# EAGLE board gatilhov1 (EAGLE 7.5.0)
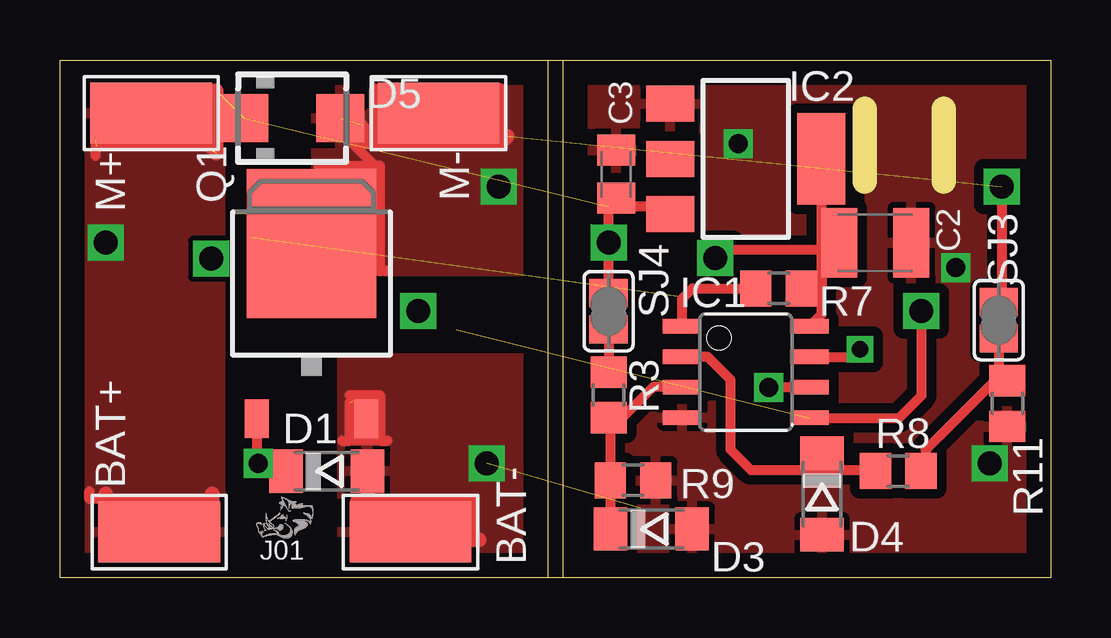
[diagram p0: board, top side]
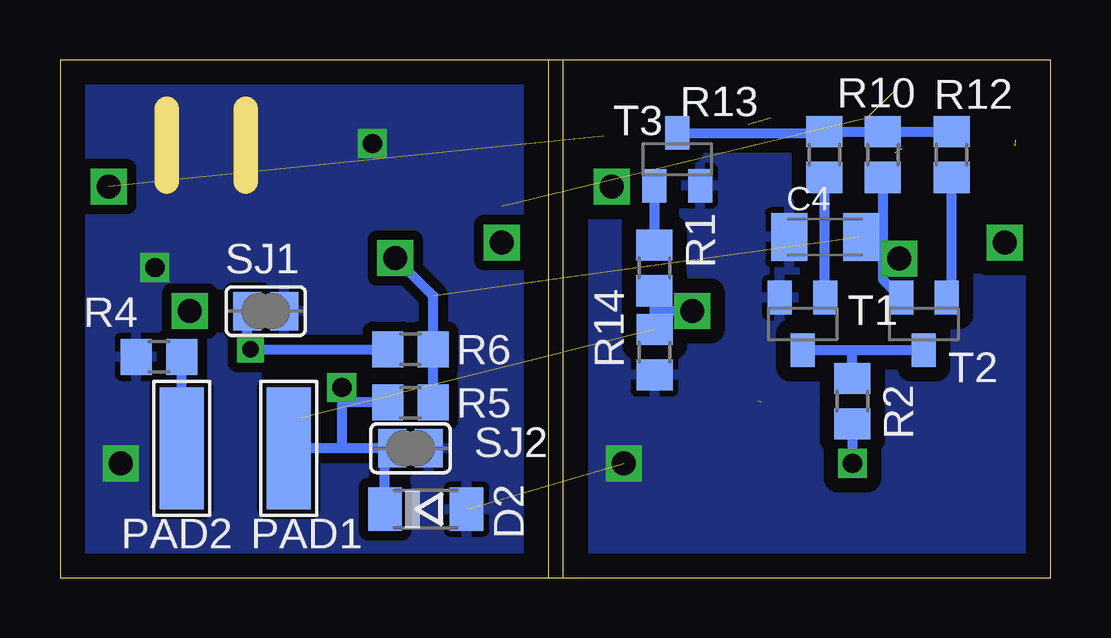
[diagram p1: board, bottom side, seen from below]

Size 41.27 x 21.59 mm. Coordinates in mm from the lower left corner, seen from the top.
Outline: 20.57,21.59 20.94,21.59 20.94,0
Outline: 20.33,21.59 20.33,0
Outline: 0,21.59 41.27,21.59 41.27,0 0,0 0,21.59
Copper layers (1*16): Top 0.035mm / dielectric 1.5mm / Bottom 0.035mm
Design rules "default": minimum track width 10mil, minimum drill 24mil, track to track 8mil, track to pad 8mil, pad to pad 8mil, via to via 8mil, smd to smd 8mil, copper to edge 40mil, drill to drill 8mil, minimum pad ring 10mil, minimum via ring 8mil, stop-mask expansion 4mil, vias tented up to drill 0mil, thermal gap 10mil
tRestrict: 2 lines
Milling: 2 lines

## Footprints (pad centres in the part's own frame; a part is rotated, then mirrored left to right if it is on the bottom)
5-2,5 = smd 2.54 x 5.08: 1 0,0
C1210K = smd 1.5 x 2.9: 1 -1.5,0; 2 1.5,0
C0805K = smd 1.3 x 1.6: 1 -1,0; 2 1,0
C1206K = smd 1.5 x 2: 1 -1.5,0; 2 1.5,0
SOD80C = smd 1.4 x 1.8: A 1.7,0; C -1.7,0
SMA = smd 2 x 2: A 2,0; C -2,0
8S1 = smd 0.6 x 1.6: 1 -1.905,-2.654; 2 -0.645,-2.654; 3 0.625,-2.654; 4 1.895,-2.654; 5 1.905,2.654; 6 0.635,2.654; 7 -0.635,2.654; 8 -1.905,2.654
SOT223 = smd 1.5 x 2: 1 -2.3,-3.15; 2 0,-3.15; 3 2.3,-3.15 | smd 3.8 x 2: 4 0,3.15
5-1,8 = smd 1.829 x 5.08: 1 0,0
TO252 = smd 1 x 1.6: 1 -2.28,-4.8; 2 2.28,-4.8 | smd 5.4 x 6.2: 3 0,2.5
R0805 = smd 1.3 x 1.5: 1 -0.95,0; 2 0.95,0
SJ = smd 1.168 x 1.6: 1 -0.762,0; 2 0.762,0
SOT23-BEC = smd 1 x 1.4: B -0.95,-1.1; C 0,1.1; E 0.95,-1.1

## Placement (x,y rotation side)
BAT+  WIREPADSMD5-2,5  [5-2,5]  4.13,1.91 90 top
BAT-  WIREPADSMD5-2,5  [5-2,5]  14.61,1.91 270 top
C2  22uF  [C1210K]  33.97,13.97 180 top
C3  100nF  [C0805K]  23.18,16.83 270 top
C4  100nF  [C1206K]  9.4,14.2 0 bottom
D1  15v  [SOD80C]  11.11,4.45 0 top
D2  4,7v  [SOD80C]  26.04,2.86 0 bottom
D3  4,7v  [SOD80C]  24.64,2.03 0 top
D4  4,7V  [SOD80C]  31.75,3.49 270 top
D5  SMCJ16A  [SMA]  9.67,19.16 0 top
IC1  TINY13-20SSU  [8S1]  28.57,8.57 270 top
IC2  LD117AS28TR  [SOT223]  28.57,17.46 270 top
M+  WIREPADSMD5-2,5  [5-2,5]  3.81,19.37 90 top
M-  WIREPADSMD5-2,5  [5-2,5]  15.77,19.37 270 top
PAD1  WIREPADSMD5-1,8  [5-1,8]  31.75,5.4 0 bottom
PAD2  WIREPADSMD5-1,8  [5-1,8]  36.2,5.4 0 bottom
Q1  IRL7843  [TO252]  10.48,11.43 0 top
R1  1k  [R0805]  16.51,12.92 90 bottom
R2  100R  [R0805]  8.26,7.36 90 bottom
R3  9,1k  [R0805]  22.86,7.62 90 top
R4  1k  [R0805]  37.15,9.21 180 bottom
R5  10k  [R0805]  26.67,7.3 0 bottom
R6  10k  [R0805]  26.67,9.53 0 bottom
R7  10k  [R0805]  29.95,12.07 0 top
R8  10k  [R0805]  34.92,4.45 0 top
R9  4k7  [R0805]  23.88,4.06 0 top
R10  1k  [R0805]  6.99,17.65 90 bottom
R11  10k  [R0805]  39.47,7.26 270 top
R12  10k  [R0805]  4.13,17.65 90 bottom
R13  10k  [R0805]  9.43,17.65 90 bottom
R14  10k  [R0805]  16.5,9.4 90 bottom
SJ1  [SJ]  32.7,11.11 180 bottom
SJ2  [SJ]  26.67,5.4 180 bottom
SJ3  [SJ]  39.12,10.74 270 top
SJ4  [SJ]  22.86,11.11 270 top
T1  BC817  [SOT23-BEC]  10.33,10.58 180 bottom
T2  BC807  [SOT23-BEC]  5.28,10.58 180 bottom
T3  BC817  [SOT23-BEC]  15.56,17.45 0 bottom

## Library data of the parts
BAT+ BAT- M+ M- PAD1 PAD2 = wirepad
C2-C4 = rcl
D1-D5 = diode
IC1 = atmel; MPN: ATTINY13-20SSU; OC_FARNELL: 1455133; OC_NEWARK: 58M3771
IC2 = v-reg
Q1 = transistor-fet
R1-R14 = resistor
SJ1-SJ4 = jumper
T1 T3 = transistor-neu-to92
T2 = transistor

## Nets
N$1: BAT-.1 C2.1 C3.1 C4.1 D1.A D2.A D3.A D4.A IC1.4 IC2.1 Q1.2 R4.2 R9.2 R11.2 R14.1 SJ1.1 SJ2.1 T1.E T3.E
N$2: D5.A M-.1 Q1.3 SJ3.1
N$4: PAD2.1 R4.1
N$5: D4.C IC1.2 R8.1
N$6: IC1.5 R1.1 R14.2
N$7: D2.C IC1.6 PAD1.1 R5.1 SJ2.2
N$8: D3.C IC1.3 R3.1 R9.1
N$9: IC1.7 R6.1 SJ1.2
N$10: IC1.1 R7.1
N$11: R10.2 R12.2 R13.2 T3.C
N$12: R1.2 T3.B
N$13: R2.2 T1.C T2.C
N$14: BAT+.1 C3.2 D5.C IC2.3 M+.1 SJ4.1
N$15: R12.1 T2.B
N$16: R13.1 T1.B
N$17: D1.C Q1.1 R2.1
N$18: R3.2 SJ4.2
N$19: R8.2 R11.1 SJ3.2
N$20: C2.2 C4.2 IC1.8 IC2.4 R5.2 R6.2 R7.2 R10.1 T2.E

## Tracks (layer width: path | path; a pad name or v marks a point on that pad's centre or on a via)
N$1  (via drill 0.8, 1)  (2 unrouted)
  Top 0.406: 13.34,5.71 13.65,5.71 | 12.06,7.62 13.34,7.62 13.34,5.71 | 13.34,5.71 12.06,5.71 | 12.06,5.71 12.06,7.3 | 11.75,5.71 12.06,5.71 | 12.19,7.37 12.19,7.11
  Top 0.61: 12.38,3.17 12.7,3.17 | 12.7,3.17 17.14,3.17 17.14,1.59 | D1.A 12.81,3.29 12.7,3.17 | 17.14,1.59 17.46,1.59 | 16.83,1.59 17.14,1.59
  other vias: 17.78,4.76 38.73,4.76 28.26,18.1 37.32,12.93
  pour Top: 11.75,0.32 19.37,0.32 19.37,9.14 11.75,9.14
  pour Top (isolate 0.406): 21.91,21.27 21.91,0.32 40.32,0.32 40.32,21.27
  pour Bottom (isolate 0.406): 40.32,21.27 40.32,0.32 21.91,0.32 21.91,21.27
  pour Bottom (isolate 0.61): 19.37,21.27 19.37,0.32 0.64,0.32 0.64,21.27
N$2  (via drill 1)  (2 unrouted)
  Top 0.406: 10.78,17.18 13.12,17.18 | 12.87,12.69 12.87,12.78 13.6,12.8 13.58,12.78 13.33,12.78 13.33,17.18 13.12,17.18 | 13.1,20.4 13.1,18.4 12.91,18.59 | v39.23,16.32 39.23,11.62 SJ3.1 | 13.12,17.18 12.2,18.1 13.3,18.1 | 12.91,18.41 12.91,18.59 | 12.91,18.59 12.6,18.9
  Top 0.61: 18.31,18.1 13.3,18.1 13.23,18.1 13.23,18.41 12.91,18.41 | 18.31,18.1 18.31,20.32 | 18.63,18.41 18.31,18.1
  other vias: 18.28,16.32
  pour Top: 10.66,21.27 10.64,12.78 19.37,12.78 19.37,21.27
N$4
  Bottom 0.406: PAD2.1 R4.1
N$5
  Top 0.406: IC1.2 26.98,9.22 27.94,8.26 27.94,5.33 28.78,4.49 31.7,4.49 | 31.7,4.49 33.93,4.49 R8.1 | D4.C 31.75,4.54 31.7,4.49
N$6  (via drill 1)  (1 unrouted)
  Top 0.406: IC1.5 34.97,6.67 35.9,7.6 35.9,11.09 v35.88,11.11
  Bottom 0.406: R1.1 16.51,11.1 | 16.51,11.1 R14.2 | v14.92,11.11 16.5,11.11 16.51,11.1
N$7  (via drill 0.8)
  Top 0.406: IC1.6 v29.53,7.94
  Bottom 0.406: v29.53,7.94 29.53,7.3 | 29.53,7.3 29.53,5.4 | R5.1 29.53,7.3 | 29.53,5.4 SJ2.2 27.73,5.09 D2.C | 29.53,5.4 PAD1.1
N$8
  Top 0.406: IC1.3 24.71,7.95 23.37,6.6 22.93,6.6 | 22.93,6.6 R3.1 | 22.93,6.6 R9.1 | R9.1 | D3.C R9.1
N$9  (via drill 0.7)
  Top 0.406: IC1.7 33.02,9.21 v33.34,9.53
  Bottom 0.406: R6.1 v33.34,9.53 33.47,9.53 SJ1.2
N$10
  Top 0.406: IC1.1 25.92,11.63 26.35,12.06 R7.1
N$11
  Bottom 0.406: 15.56,18.09 T3.C 9.38,18.55 R13.2 R10.2 R12.2
N$12
  Bottom 0.406: T3.B 16.51,13.97 R1.2
N$13
  Bottom 0.406: T2.C 8.3,9.48 | 8.3,9.48 T1.C | R2.2 8.26,9.44 8.3,9.48
N$14  (via drill 1)  (4 unrouted)
  Top 0.406: IC2.3 24.69,15.48 22.94,15.48 | 22.94,15.48 22.86,15.48 v22.86,13.97 SJ4.1 | 22.94,15.48 23.18,15.88 C3.2 | 1.77,18.25 1.47,18.25 1.47,17.59 | 2.23,3.29 1.22,3.29 1.22,3.61 | 1.5,18 6.2,18 6.2,17.9
  Top 0.61: 6.35,3.17 4.45,3.17 | 4.45,3.17 1.91,3.17 | BAT+.1 4.13,2.86 4.45,3.17 | 1.91,3.17 1.91,3.49 | 1.91,3.17 1.91,2.86 | 6.35,3.17 6.35,3.49 | 6.35,3.17 6.35,2.86 | 6.5,20.3 6.5,17.7
  other vias: 1.91,13.97
  pour Top: 0.64,0.32 0.64,21.27 6.67,21.27 6.67,0.32
N$15
  Bottom 0.406: R12.1 4.13,16.19 4.13,11.88 T2.B
N$16
  Bottom 0.406: R13.1 9.43,11.74 T1.B
N$17  (via drill 0.8)
  Top 0.406: Q1.1 8.2,4.82 v8.26,4.76 8.57,4.45 D1.C
  Bottom 0.406: R2.1 v8.26,4.76
N$18
  Top 0.406: SJ4.2 R3.2
N$19
  Top 0.406: 35.88,4.76 R8.2 36.07,4.64 36.07,5.33 38.95,8.21 R11.1 39.12,8.57 SJ3.2
N$20  (via drill 1)  (1 unrouted)
  Top 0.406: IC2.4 31.73,12.06 | 31.73,12.06 31.73,10.97 IC1.8 | 31.7,12.09 31.73,12.06 | R7.2 31.68,12.06 31.7,12.09 | 31.75,13.65 32.47,13.65 C2.2 | 31.75,13.65 27.62,13.65 v27.3,13.34 | 31.7,12.09 31.75,12.09 31.75,13.65
  Bottom 0.406: R5.2 R6.2 25.72,11.75 v27.3,13.34 | R10.1 6.99,14.2 | 6.99,14.2 6.99,13.3 | 6.99,13.3 6.99,12.44 T2.E | 6.99,13.3 v6.3,13.3 6.4,13.2 | C4.2 6.99,14.2

## Text on the board
tPlace: J01